# EAGLE board KOMPARATOR LM339 (EAGLE 5.06)
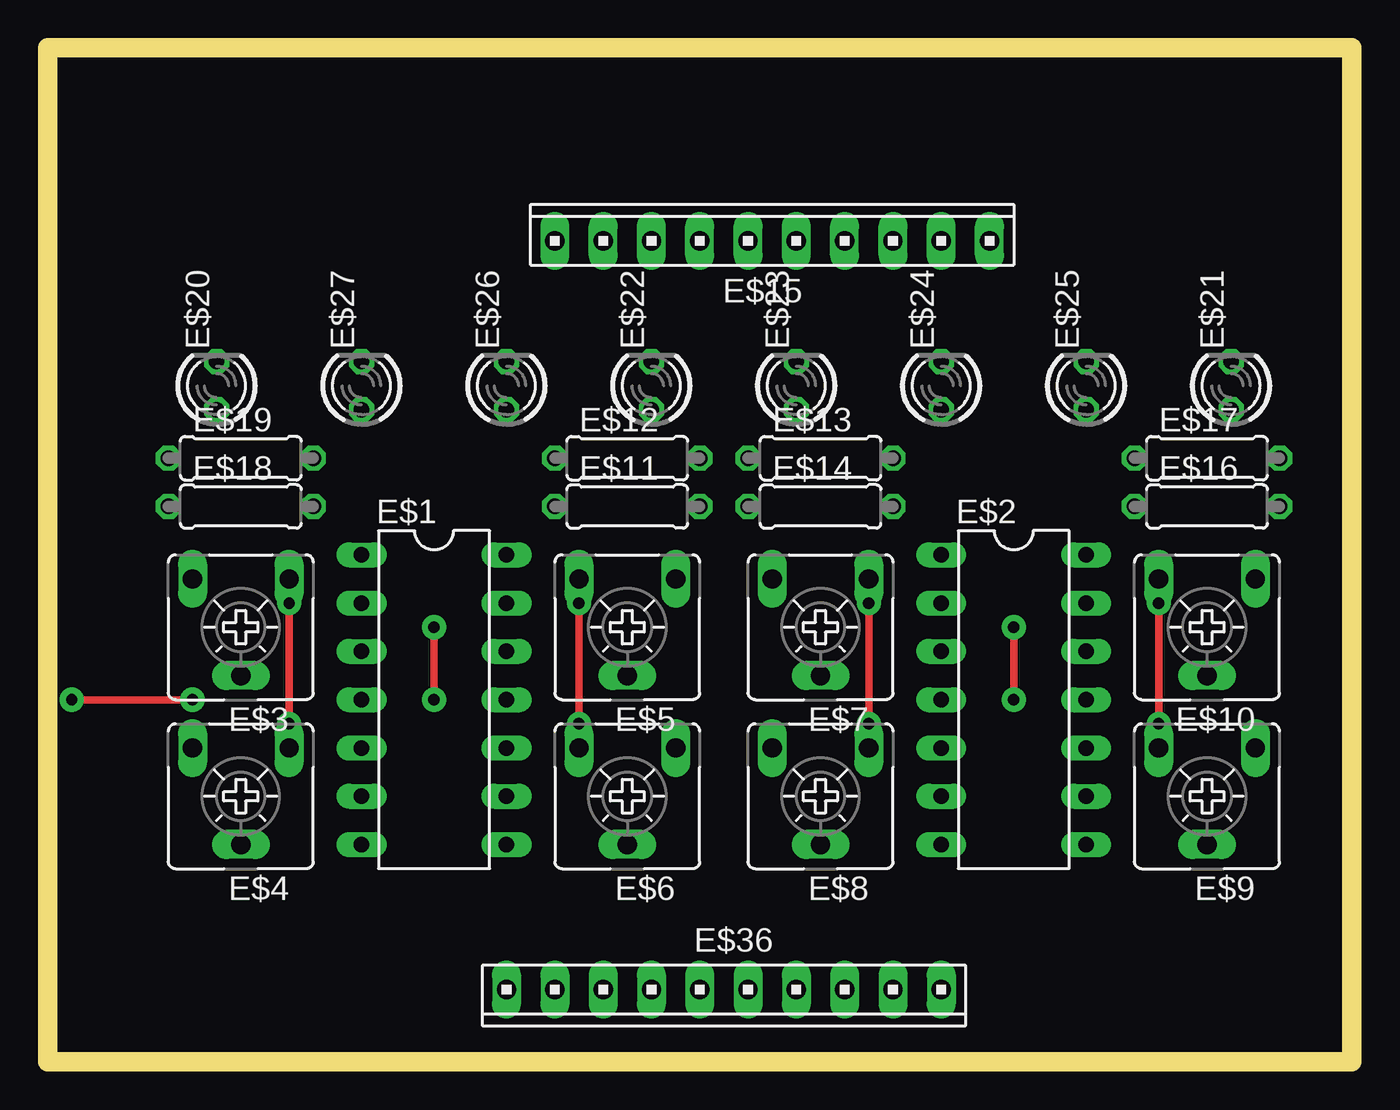
[diagram p0: board, top side]
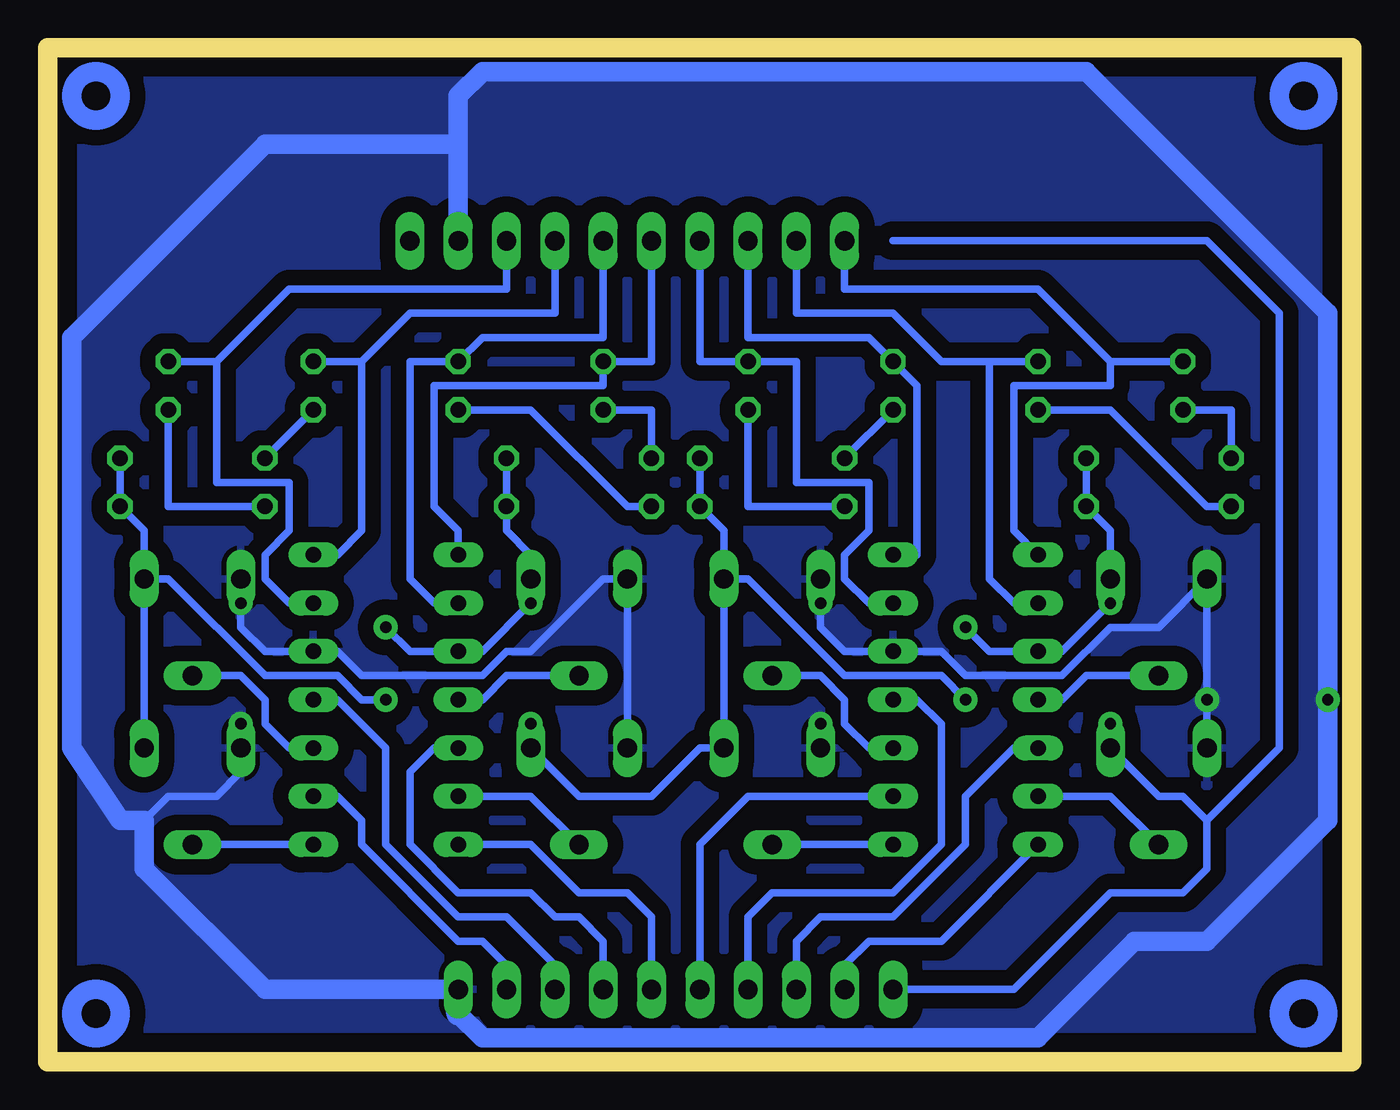
[diagram p1: board, bottom side, seen from below]

Size 68.58 x 53.34 mm. Coordinates in mm from the lower left corner, seen from the top.
Outline: 0,0 0,53.34 68.58,53.34 68.58,0 0,0
Copper layers (1*16): Top 0.035mm / dielectric 1.5mm / Bottom 0.035mm
Design rules "default": minimum track width 10mil, minimum drill 24mil, track to track 8mil, track to pad 8mil, pad to pad 8mil, via to via 8mil, smd to smd 8mil, copper to edge 40mil, drill to drill 8mil, minimum pad ring 10mil, minimum via ring 8mil, stop-mask expansion 4mil, vias tented up to drill 0mil, thermal gap 10mil

## Footprints (pad centres in the part's own frame; a part is rotated, then mirrored left to right if it is on the bottom)
DIL14 = drill 0.813 long: 1 -7.62,-3.81; 2 -5.08,-3.81; 3 -2.54,-3.81; 4 0,-3.81; 5 2.54,-3.81; 6 5.08,-3.81; 7 7.62,-3.81; 8 7.62,3.81; 9 5.08,3.81; 10 2.54,3.81; 11 0,3.81; 12 -2.54,3.81; 13 -5.08,3.81; 14 -7.62,3.81
CA6V = drill 1.016 long: A -2.54,-2.54; E 2.54,-2.54; S 0,2.54
0207/7 = drill 0.813 octagon: 1 -3.81,0; 2 3.81,0
10X10MTA = drill 1.016 long: 1 11.43,0; 2 8.89,0; 3 6.35,0; 4 3.81,0; 5 1.27,0; 6 -1.27,0; 7 -3.81,0; 8 -6.35,0; 9 -8.89,0; 10 -11.43,0
LED3MM = drill 0.813 octagon: A -1.27,0; K 1.27,0

## Placement (x,y rotation side)
E$1  [DIL14]  20.32,19.05 270 top
E$2  [DIL14]  50.8,19.05 270 top
E$3  [CA6V]  10.16,22.86 180 top
E$4  [CA6V]  10.16,13.97 180 top
E$5  [CA6V]  30.48,22.86 180 top
E$6  [CA6V]  30.48,13.97 180 top
E$7  [CA6V]  40.64,22.86 180 top
E$8  [CA6V]  40.64,13.97 180 top
E$9  [CA6V]  60.96,13.97 180 top
E$10  [CA6V]  60.96,22.86 180 top
E$11  [0207/7]  30.48,29.21 0 top
E$12  [0207/7]  30.48,31.75 0 top
E$13  [0207/7]  40.64,31.75 0 top
E$14  [0207/7]  40.64,29.21 0 top
E$15  [10X10MTA]  38.1,43.18 0 top
E$16  [0207/7]  60.96,29.21 0 top
E$17  [0207/7]  60.96,31.75 0 top
E$18  [0207/7]  10.16,29.21 0 top
E$19  [0207/7]  10.16,31.75 0 top
E$20  [LED3MM]  8.89,35.56 90 top
E$21  [LED3MM]  62.23,35.56 90 top
E$22  [LED3MM]  31.75,35.56 90 top
E$23  [LED3MM]  39.37,35.56 90 top
E$24  [LED3MM]  46.99,35.56 90 top
E$25  [LED3MM]  54.61,35.56 90 top
E$26  [LED3MM]  24.13,35.56 90 top
E$27  [LED3MM]  16.51,35.56 90 top
E$36  [10X10MTA]  35.56,3.81 180 top

## Library data of the parts
E$1 E$2 = ic-package
E$3-E$10 = pot
E$11-E$14 E$16-E$19 = resistor
E$15 E$36 = con-amp
E$20-E$27 = led

## Nets
S$1: E$1.8 E$6.S
S$2: E$1.9 E$36.5
S$3: E$1.10 E$5.S
S$4: E$1.6 E$4.S
S$5: E$1.3 E$2.3 E$3.A E$4.A E$5.A E$6.A E$7.A E$8.A E$9.A E$10.A E$11.2 E$12.2 E$13.2 E$14.2 E$16.2 E$17.2 E$18.2 E$19.2 E$36.1
S$6: E$2.2 E$24.K
S$9: E$1.13 E$22.K
S$10: E$2.1 E$23.K
S$11: E$1.4 E$3.S
S$12: E$2.4 E$7.S
S$13: E$19.1 E$20.A
S$14: E$12.1 E$26.A
S$15: E$13.1 E$23.A
S$16: E$17.1 E$25.A
S$17: E$2.13 E$21.K
S$18: E$1.14 E$26.K
S$19: E$18.1 E$27.A
S$20: E$11.1 E$22.A
S$21: E$14.1 E$24.A
S$22: E$16.1 E$21.A
S$23: E$2.6 E$8.S
S$24: E$2.8 E$9.S
S$25: E$2.10 E$10.S
S$26: E$1.2 E$27.K
S$27: E$1.1 E$20.K
S$29: E$2.7 E$36.6
S$30: E$2.5 E$36.7
S$31: E$2.11 E$36.8
S$32: E$2.9 E$36.9
S$33: E$1.11 E$36.4
S$34: E$1.5 E$36.3
S$35: E$1.7 E$36.2
S$39: E$1.12 E$2.12 E$3.E E$4.E E$5.E E$6.E E$7.E E$8.E E$9.E E$10.E E$36.10
S$41: E$2.14 E$25.K

## Tracks (layer width: path | path; a pad name or v marks a point on that pad's centre or on a via)
S$1
  Bottom 0.406: E$1.8 E$6.S
S$2
  Bottom 0.406: E$1.9 31.75,13.97 34.29,11.43 E$36.5
S$3
  Bottom 0.406: E$5.S 27.94,20.32 26.67,19.05 26.67,17.78 25.4,16.51 E$1.10
S$4
  Bottom 0.406: E$1.6 12.7,13.97 E$4.S
S$5  (via drill 0.6 pad 1.27)
  Top 0.406: v50.8,22.86 v50.8,19.05 | v43.18,17.78 v43.18,24.13 | v20.32,22.86 v20.32,19.05 | v12.7,17.78 v12.7,24.13
  Bottom 0.406: E$17.2 E$16.2 63.5,27.94 E$9.A | E$10.A E$9.A | E$10.A E$9.A | E$10.A 62.23,25.4 57.15,20.32 53.34,20.32 52.07,19.05 v50.8,19.05 | E$13.2 E$14.2 44.45,27.94 43.18,26.67 E$7.A | v50.8,22.86 49.53,21.59 E$2.3 45.72,21.59 v43.18,24.13 | v43.18,24.13 E$7.A | v43.18,24.13 E$7.A | v43.18,17.78 E$8.A 40.64,13.97 36.83,13.97 34.29,16.51 E$6.A | E$11.2 E$12.2 E$11.2 | E$11.2 33.02,27.94 33.02,26.67 | E$6.A 33.02,26.67 | E$5.A E$6.A | E$5.A 33.02,26.67 | E$5.A E$6.A | E$5.A 31.75,25.4 26.67,20.32 21.59,20.32 v20.32,19.05 | E$19.2 E$18.2 12.7,27.94 E$3.A | v20.32,22.86 19.05,21.59 E$1.3 15.24,21.59 v12.7,24.13 | v12.7,24.13 E$3.A | v12.7,24.13 E$3.A | v12.7,17.78 E$4.A 10.16,13.97 8.89,13.97 7.62,12.7 | 7.62,12.7 3.81,16.51 3.81,39.37 7.62,43.18 24.13,43.18 | E$36.1 17.78,3.81 12.7,8.89 8.89,8.89 7.62,10.16 7.62,12.7
S$6
  Bottom 0.406: 39.37,43.18 39.37,38.1 45.72,38.1 E$24.K 49.53,36.83 49.53,25.4 48.26,24.13 E$2.2
S$9
  Bottom 0.406: 34.29,43.18 34.29,36.83 E$22.K 29.21,36.83 29.21,30.48 25.4,30.48 25.4,27.94 26.67,26.67 26.67,25.4 25.4,24.13 E$1.13
S$10
  Bottom 0.406: 36.83,43.18 36.83,36.83 E$23.K 39.37,35.56 48.26,35.56 48.26,29.21 46.99,27.94 E$2.1
S$11
  Bottom 0.406: E$3.S 13.97,20.32 15.24,19.05 E$1.4
S$12
  Bottom 0.406: E$7.S 44.45,20.32 45.72,19.05 E$2.4
S$13
  Bottom 0.406: E$20.A 6.35,34.29 E$19.1
S$14
  Bottom 0.406: E$26.A E$12.1
S$15
  Bottom 0.406: E$23.A 36.83,34.29 E$13.1
S$16
  Bottom 0.406: E$25.A E$17.1
S$17
  Bottom 0.406: 44.45,43.18 44.45,40.64 55.88,40.64 59.69,36.83 | 59.69,36.83 59.69,30.48 55.88,30.48 55.88,27.94 57.15,26.67 57.15,25.4 55.88,24.13 E$2.13 | 59.69,36.83 E$21.K
S$18
  Bottom 0.406: 31.75,43.18 31.75,38.1 25.4,38.1 E$26.K 22.86,35.56 22.86,30.48 | 22.86,30.48 22.86,29.21 | 22.86,30.48 22.86,26.67 E$1.14
S$19
  Bottom 0.406: E$18.1 7.62,29.21 12.7,34.29 E$27.A
S$20
  Bottom 0.406: E$11.1 31.75,29.21 E$22.A
S$21
  Bottom 0.406: E$24.A 43.18,34.29 38.1,29.21 E$14.1
S$22
  Bottom 0.406: E$21.A 62.23,29.21 E$16.1
S$23
  Bottom 0.406: E$8.S 43.18,13.97 E$2.6
S$24
  Bottom 0.406: E$2.8 E$9.S
S$25
  Bottom 0.406: E$10.S 58.42,20.32 57.15,19.05 57.15,17.78 55.88,16.51 E$2.10
S$26
  Bottom 0.406: 29.21,43.18 29.21,39.37 24.13,39.37 21.59,36.83 19.05,36.83 | 19.05,36.83 19.05,27.94 | 19.05,36.83 19.05,25.4 17.78,24.13 E$1.2 | 19.05,36.83 E$27.K
S$27
  Bottom 0.406: 12.7,36.83 12.7,35.56 17.78,35.56 17.78,27.94 E$1.1 | 12.7,36.83 16.51,40.64 26.67,40.64 26.67,43.18 | 12.7,36.83 E$20.K
S$29
  Bottom 0.406: 44.45,11.43 45.72,11.43 | 44.45,11.43 E$2.7 | 44.45,11.43 43.18,11.43 40.64,8.89 38.1,8.89 36.83,7.62 E$36.6
S$30
  Bottom 0.406: E$2.5 48.26,16.51 49.53,15.24 49.53,11.43 46.99,8.89 43.18,8.89 41.91,7.62 40.64,7.62 39.37,6.35 E$36.7
S$31
  Bottom 0.406: E$2.11 53.34,19.05 50.8,16.51 50.8,11.43 46.99,7.62 44.45,7.62 41.91,5.08 E$36.8
S$32
  Bottom 0.406: E$2.9 53.34,13.97 52.07,12.7 52.07,11.43 46.99,6.35 45.72,6.35 44.45,5.08 E$36.9
S$33
  Bottom 0.406: E$1.11 22.86,19.05 21.59,17.78 21.59,11.43 24.13,8.89 30.48,8.89 31.75,7.62 E$36.4
S$34
  Bottom 0.406: E$1.5 17.78,16.51 20.32,13.97 20.32,11.43 24.13,7.62 27.94,7.62 29.21,6.35 E$36.3
S$35
  Bottom 0.406: E$1.7 21.59,6.35 25.4,6.35 26.67,5.08 E$36.2
S$39  (via drill 0.6 pad 1.27)
  Top 0.406: v58.42,17.78 v58.42,24.13 | v27.94,24.13 v27.94,17.78 | v1.27,19.05 v7.62,19.05
  Bottom 0.406: 63.5,12.7 62.23,13.97 59.69,13.97 58.42,15.24 E$9.E v58.42,17.78 | v58.42,24.13 E$10.E v58.42,24.13 | v58.42,24.13 58.42,22.86 57.15,21.59 | 57.15,21.59 55.88,21.59 | 57.15,21.59 E$2.12 53.34,21.59 52.07,20.32 45.72,20.32 44.45,21.59 43.18,21.59 39.37,25.4 E$7.E E$8.E | v7.62,19.05 E$3.E 10.16,22.86 12.7,22.86 15.24,20.32 20.32,20.32 21.59,21.59 E$1.12 26.67,21.59 27.94,22.86 v27.94,24.13 | v7.62,19.05 E$4.E v7.62,19.05 | v27.94,24.13 E$5.E | v27.94,24.13 E$5.E | v27.94,24.13 E$5.E | v27.94,17.78 E$6.E
  Bottom 1.016: 46.99,2.54 45.72,1.27 16.51,1.27 11.43,6.35 7.62,6.35 1.27,12.7 v1.27,19.05 1.27,39.37 13.97,52.07 45.72,52.07 46.99,50.8 46.99,43.18 46.99,48.26 57.15,48.26 67.31,38.1 67.31,16.51 64.77,12.7 63.5,12.7 63.5,10.16 57.15,3.81 E$36.10
  Bottom 1.27: 46.99,2.54 E$36.10
  pour Bottom (isolate 0.813): 0,53.34 68.58,53.34 68.58,0 0,0
S$41
  Bottom 0.406: 52.07,36.83 E$25.K | 52.07,36.83 52.07,27.94 53.34,26.67 E$2.14 | 41.91,43.18 41.91,39.37 49.53,39.37 52.07,36.83
(copper drawn outside any net)
  shapes: Bottom circle x4